# EAGLE board Tab-Experiment (EAGLE 9.4.2)
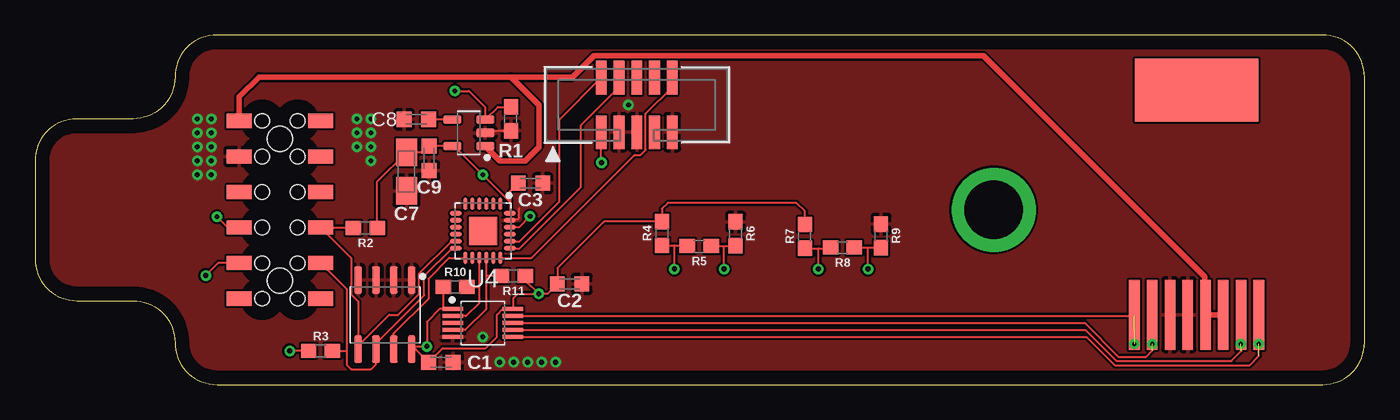
[diagram p0: board, top side]
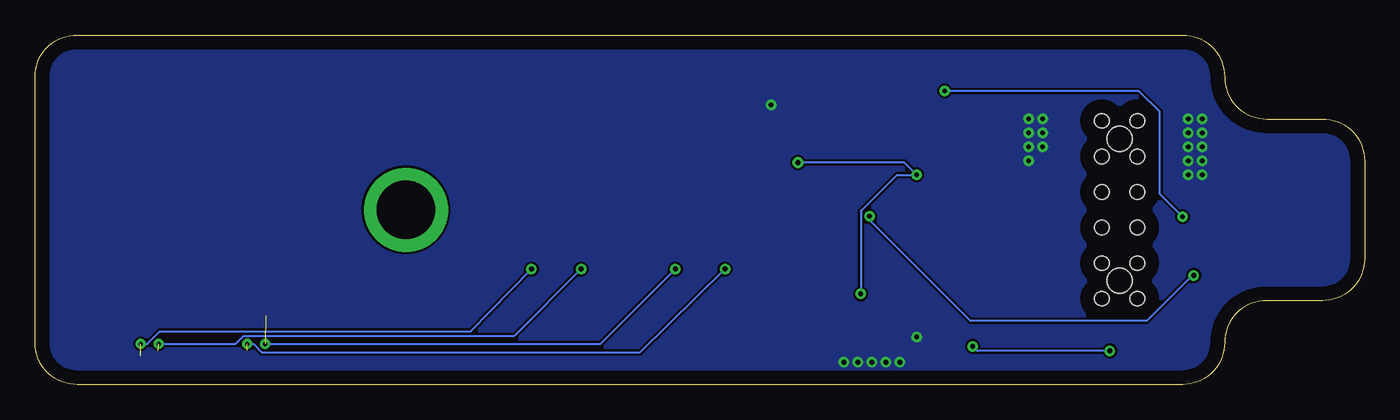
[diagram p1: board, bottom side, seen from below]

Size 95 x 25 mm. Coordinates in mm from the lower left corner, seen from the top.
Outline: 92,0 arc90 95,3 95,22 arc90 92,25 13,25 arc90 10,22 arc-90 7,19 3,19 arc90 0,16 0,9 arc90 3,6 7,6 arc-90 10,3 arc90 13,0 92,0
Copper layers (1*16): Top 0.035mm / dielectric 1.5mm / Bottom 0.035mm
Design rules "default": minimum track width 6mil, minimum drill 0.35mm, track to track 6mil, track to pad 6mil, pad to pad 6mil, via to via 6mil, smd to smd 6mil, copper to edge 40mil, drill to drill 6mil, minimum pad ring 10mil, minimum via ring 8mil, stop-mask expansion 4mil, vias tented up to drill 0mil, thermal gap 10mil

## Footprints (pad centres in the part's own frame; a part is rotated, then mirrored left to right if it is on the bottom)
C0603K = smd 1.05 x 1.08: 1 -0.875,0; 2 0.875,0
A/3216-18R = smd 1.95 x 1.5: + 1.375,0; - -1.375,0
M20-7810645 = smd 1.02 x 1.78: P$1 -6.35,-2.91; P$2 -3.81,-2.91; P$3 -1.27,-2.91; P$4 1.27,-2.91; P$5 3.81,-2.91; P$6 6.35,-2.91; P$7 6.35,2.91; P$8 3.81,2.91; P$9 1.27,2.91; P$10 -1.27,2.91; P$11 -3.81,2.91; P$12 -6.35,2.91 | hole 1.02: -6.35,1.27; -3.81,1.27; -1.27,1.27; 1.27,1.27; 3.81,1.27; 6.35,1.27; 6.35,-1.27; 3.81,-1.27; 1.27,-1.27; -1.27,-1.27; -3.81,-1.27; -6.35,-1.27 | hole 1.8: -5.08,0; 5.08,0
85513-5009 = smd 0.76 x 5: 1 4.445,0; 2 3.175,0; 3 1.905,0; 4 0.635,0; 5 -0.635,0; 6 -1.905,0; 7 -3.175,0; 8 -4.445,0 | smd 8.8 x 4.5: P$1 0,16.05
0603 = smd 1.1 x 1: 1 -0.85,0; 2 0.85,0
QFN50P400X400X100-25T200 = smd 0.837 x 0.27: 1 -1.937,1.25; 2 -1.937,0.75; 3 -1.937,0.25; 4 -1.937,-0.25; 5 -1.937,-0.75; 6 -1.937,-1.25; 13 1.937,-1.25; 14 1.937,-0.75; 15 1.937,-0.25; 16 1.937,0.25; 17 1.937,0.75; 18 1.937,1.25 | smd 0.27 x 0.837: 7 -1.25,-1.937; 8 -0.75,-1.937; 9 -0.25,-1.937; 10 0.25,-1.937; 11 0.75,-1.937; 12 1.25,-1.937; 19 1.25,1.937; 20 0.75,1.937; 21 0.25,1.937; 22 -0.25,1.937; 23 -0.75,1.937; 24 -1.25,1.937 | smd 2 x 2: 25 0,0
SOIC127P600X175-8 = smd 1.968 x 0.569: 1 -2.473,1.905; 2 -2.473,0.635; 3 -2.473,-0.635; 4 -2.473,-1.905; 5 2.473,-1.905; 6 2.473,-0.635; 7 2.473,0.635; 8 2.473,1.905
SOP50P490X110-10 = smd 1.438 x 0.297: 1 -2.145,1; 2 -2.145,0.5; 3 -2.145,0; 4 -2.145,-0.5; 5 -2.145,-1; 6 2.145,-1; 7 2.145,-0.5; 8 2.145,0; 9 2.145,0.5; 10 2.145,1
SOT95P280X145-5 = smd 1.262 x 0.609: 1 -1.175,0.95; 2 -1.175,0; 3 -1.175,-0.95; 4 1.175,-0.95; 5 1.175,0.95
2X05_1.27MM_BOX_NOPOSTS = smd 0.76 x 2.4: 1 -2.54,-1.95; 2 -2.54,1.95; 3 -1.27,-1.95; 4 -1.27,1.95; 5 0,-1.95; 6 0,1.95; 7 1.27,-1.95; 8 1.27,1.95; 9 2.54,-1.95; 10 2.54,1.95

## Placement (x,y rotation side)
C1  .1uf  [C0603K]  29,1.6 0 top
C2  .1uf  [C0603K]  38.2,7.2 0 top
C3  .1uf  [C0603K]  35.4,14.4 0 top
C7  6.8uf  [A/3216-18R]  26.54,15.23 90 top
C8  [C0603K]  27.25,18.97 180 top
C9  .1uf  [C0603K]  28.17,16.18 270 top
J1  2X6-HEADERS  [M20-7810645]  17.5,12.5 90 top
J2  95501-6889VERT  [85513-5009]  83,5 0 top
R1  100k  [0603]  34,19 90 top
R2  4.7k  [0603]  23.6,11.2 180 top
R3  4.7k  [0603]  20.4,2.4 0 top
R4  330  [0603]  44.8,10.8 90 top
R5  100  [0603]  47.46,9.89 180 top
R6  300  [0603]  50.06,10.79 270 top
R7  330  [0603]  55,10.6 90 top
R8  100  [0603]  57.69,9.79 180 top
R9  300  [0603]  60.45,10.62 270 top
R10  4.7k  [0603]  30.02,6.98 0 top
R11  4.7k  [0603]  34.18,7.76 180 top
U2  ATSAMD09  [QFN50P400X400X100-25T200]  32,11 270 top
U3  M24C02-WMN6TP  [SOIC127P600X175-8]  25,5 270 top
U4  PCA9615  [SOP50P490X110-10]  32,4.4 0 top
U$4  MIC5219-3.3YM5-TR  [SOT95P280X145-5]  31,18 180 top
X1  [2X05_1.27MM_BOX_NOPOSTS]  43,20 0 top

## Library data of the parts
C1-C3 C7-C9 = rcl; SPICEPREFIX: C
J1 J2 U2-U4 U$4 = Conservify
R1-R11 = SparkFun-Resistors; PROD_ID: RES-07828
X1 = microbuilder

## Nets
3V3: C1.1 C2.1 C3.1 C7.+ C9.1 R2.1 R3.1 R4.2 R7.2 R10.1 R11.1 U2.24 U3.8 U4.1 U4.10 U$4.5 X1.1
EN: U4.3
ENABLE: J1.P$10 R1.2 U$4.3
G1: J1.P$11 U2.22
G2: J1.P$12
GND: C1.2 C2.2 C3.2 C7.- C8.2 C9.2 J1.P$8 J2.5 J2.6 R1.1 R6.1 R9.1 U2.23 U3.1 U3.2 U3.3 U3.4 U4.5 U$4.2 X1.3 X1.5 X1.9
IN3V3: J1.P$9
KEY: X1.7
LCL-M: J2.1 R8.1 R9.2 U4.6
LCL-P: J2.2 R7.1 R8.2 U4.7
LDA-M: J2.8 R5.1 R6.2 U4.9
LDA-P: J2.7 R4.1 R5.2 U4.8
MISO: J1.P$4
MOSI: J1.P$5
N$6: C8.1 U$4.4
NC: J1.P$1
RESET: U2.18 X1.10
SCK: J1.P$6
SCL: J1.P$2 R3.2 U2.12 U3.6
SDA: J1.P$3 R2.2 U2.11 U3.5
SENSE-SCL: R11.2 U2.16 U4.4
SENSE-SDA: R10.2 U2.15 U4.2
SWCLK: U2.19 X1.4
SWDIO: U2.20 X1.2
SWO: X1.6
TDI: X1.8
UNREG: J1.P$7 J2.3 J2.4 U$4.1
WC: U2.13 U3.7

## Tracks (layer width: path | path; a pad name or v marks a point on that pad's centre or on a via)
3V3  (via drill 0.35)
  Top 0.152: 33.94,13.06 v32,15 29.95,17.05 U$4.5 C9.1 27.73,16.61 C7.+ 24.45,14.52 R2.1 | 33.94,13.06 U2.24 | v40.48,15.88 40.46,15.89 X1.1 | C3.1 33.94,13.81 33.94,13.06 | v36,6.49 36.62,6.49 C2.1 37.33,8.32 40.65,11.65 R4.2 44.8,12.57 45.23,13 54.4,13 55,12.4 R7.2 | 27.2,2.53 C1.1 29.12,2.6 32.2,2.6 33,3.4 33,5 33.4,5.4 U4.10 34.2,5.46 34.2,6.2 34.49,6.49 v36,6.49 | 27.2,2.53 27,2.73 v28,2.73 28,4.49 28.91,5.4 29.22,5.4 | 27.2,2.53 U3.8 | R3.1 v18.2,2.4 | 29.22,5.4 U4.1 | R11.1 35.03,7.46 v36,6.49 | R10.1 29.17,5.46 29.22,5.4
  Bottom 0.152: v36,6.49 36,12.4 33.4,15 v32,15 32.88,15.88 v40.48,15.88 | v18.2,2.4 27.67,2.4 v28,2.73
ENABLE  (via drill 0.35)
  Top 0.152: R1.2 33.08,19.85 U$4.3 32.17,19.82 31,21 v30,21 | J1.P$10 13.77,11.23 v13,12
  Bottom 0.152: v13,12 14.63,13.63 14.63,19.51 16.11,21 v30,21
G1  (via drill 0.35)
  Top 0.152: J1.P$11 13.09,8.69 v12.2,7.8 | v35.36,12.04 34.58,11.25 U2.22
  Bottom 0.152: v12.2,7.8 12.31,7.8 15.57,4.55 28.15,4.55 35.36,11.76 v35.36,12.04
GND  (via drill 0.35)
  Top 0.152: U$4.2 32.33,18.15 R1.1 | U2.23 33.99,11.8 34.48,11.8 34.6,11.91 34.6,12.6
  other vias: 23,19 24,19 24,18 23,18 24,17 23,17 24,16 11.6,19 11.6,18 11.6,17 11.6,16 11.6,15 12.6,19 12.6,18 12.6,17 12.6,16 12.6,15 32,3.4 42.4,20 37.2,1.6 33.2,1.6 34.2,1.6 35.2,1.6 36.2,1.6
  pour Top: 0,25 95,25 95,0 0,0
  pour Bottom: 0,25 95,25 95,0 0,0
LCL-M  (via drill 0.3, 0.35)  (1 unrouted)
  Top 0.152: U4.6 75.14,3.4 77.15,1.39 86.79,1.39 87.44,2.04 J2.1 | R8.1 59.53,9.79 | 59.53,9.79 60.43,9.79 R9.2 | v59.53,8.26 59.53,9.79
  Bottom 0.152: v59.53,8.26 63.87,3.79 86.09,3.79 86.97,2.9 v87.45,2.9
LCL-P  (via drill 0.3, 0.35)  (1 unrouted)
  Top 0.152: U4.7 75.07,3.9 77.27,1.7 85.5,1.7 86.2,2.4 86.2,4.97 J2.2 | R7.1 56,9.75 | 56,9.75 56.8,9.75 R8.2 | v55.97,8.26 55.97,9.72 56,9.75
  Bottom 0.152: v86.15,2.9 80.67,2.9 80.09,3.48 60.75,3.48 v55.97,8.26
LDA-M  (via drill 0.3, 0.35)  (1 unrouted)
  Top 0.152: J2.8 78.58,4.97 78.5,4.9 U4.9 | R5.1 49.24,9.89 | 49.24,9.89 50.02,9.89 R6.2 | v49.24,8.26 49.24,9.89
  Bottom 0.152: v78.55,2.9 54.6,2.9 v49.24,8.26
LDA-P  (via drill 0.3, 0.35)  (1 unrouted)
  Top 0.152: J2.7 79.85,4.97 79.85,2.45 79.4,2 77.4,2 75,4.4 U4.8 | R4.1 45.69,9.95 | 45.69,9.95 46.55,9.95 R5.2 | v45.69,8.26 45.69,9.95
  Bottom 0.152: v79.85,2.9 79.37,2.9 78.79,2.32 51.75,2.32 v45.69,8.26
N$1  (via drill 4.2 pad 6)
  other vias: 68.5,12.5
N$6
  Top 0.152: C8.1 29.81,18.97 U$4.4
RESET
  Top 0.152: X1.10 45.54,21.27 43.63,19.36 43.63,16.78 43.26,16.41 42.84,16.41 35.5,9.06 U2.18
SCL
  Top 0.152: U2.12 29.81,9.75 27.81,7.75 27.81,6.38 24.37,2.93 U3.6 24.37,1.46 24,1.09 22.6,1.09 22.6,1.1 22.28,1.42 22.28,2.42 | J1.P$2 22.28,6.82 22.28,2.42 | R3.2 22.26,2.4 22.28,2.42
SDA
  Top 0.152: U2.11 29.77,10.25 27.45,7.94 27.45,6.5 25.96,5 25.31,5 23.09,2.78 U3.5 23.09,5.95 22.58,6.46 22.58,9.06 J1.P$3 22.72,11.23 R2.2
SENSE-SCL
  Top 0.152: U4.4 30.74,3.9 32.25,5.4 32.25,7.75 | 32.25,7.75 U2.16 | R11.2 32.27,7.76 32.25,7.75
SENSE-SDA
  Top 0.152: U4.2 30.79,4.9 31.75,5.85 31.75,7 | 31.75,7 U2.15 | R10.2 30.88,7 31.75,7
SWCLK
  Top 0.152: X1.4 41.73,21.27 39,18.54 39,14.12 34.64,9.75 U2.19
SWDIO
  Top 0.152: X1.2 37.47,18.96 37.47,13.08 34.64,10.25 U2.20
UNREG
  Top 0.406: J1.P$7 14.59,20.59 16,22 34,22 | 34,22 36,20 36,17 35,16 33.23,16 U$4.1 | 34,22 38.43,22 39.93,23.51 67.77,23.51 83.6,7.68 83.6,5.04 J2.4 J2.3
WC
  Top 0.152: U2.13 29.61,9.06 28.11,7.57 28.11,6.14 25.63,3.66 U3.7